# EAGLE board Pin-with-a-screen-3v3 (EAGLE 7.6.0)
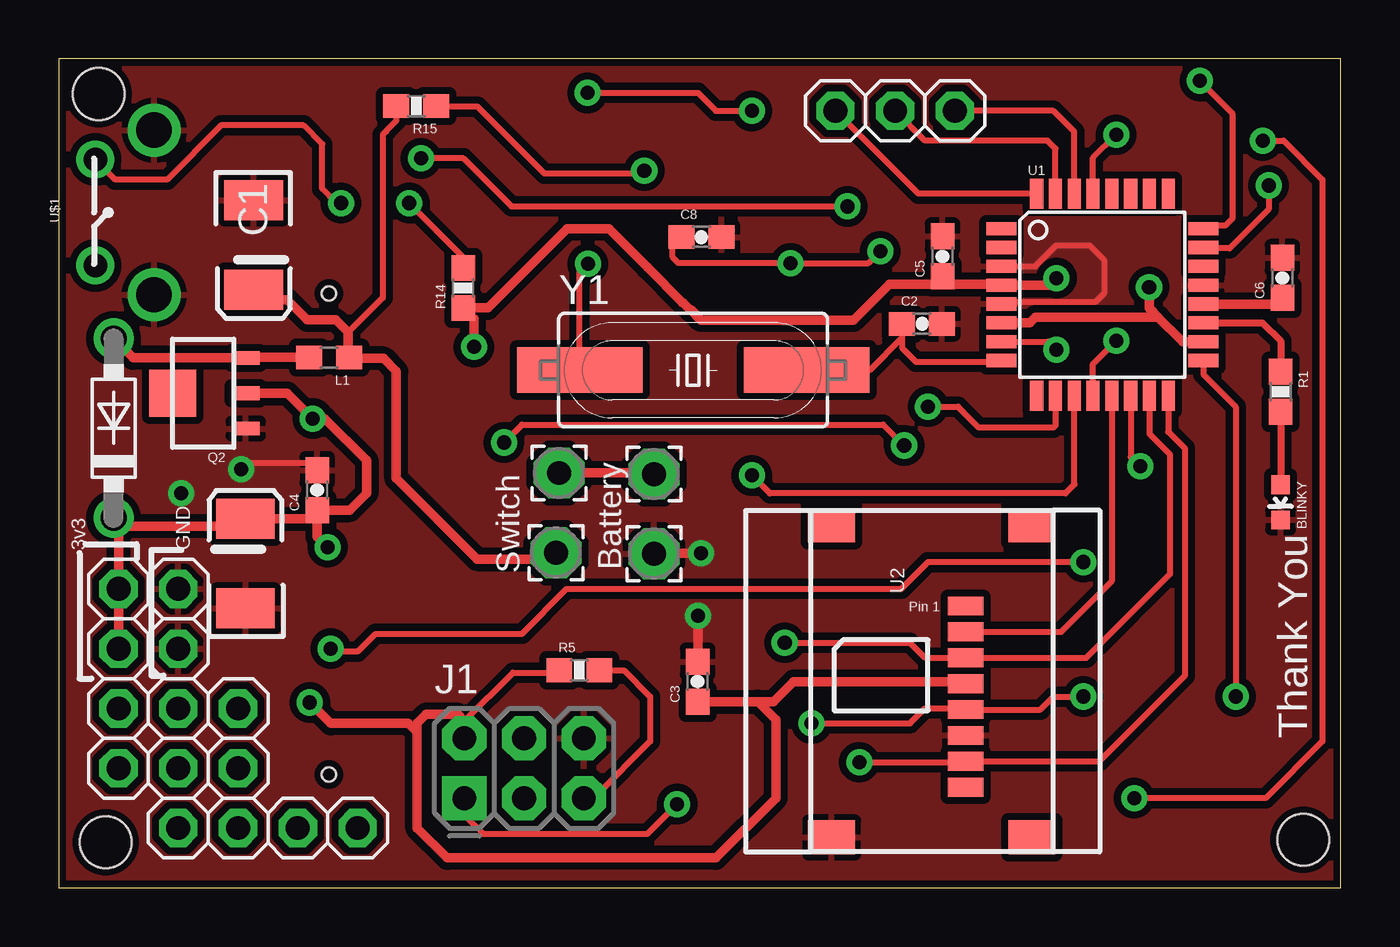
[diagram p0: board, top side]
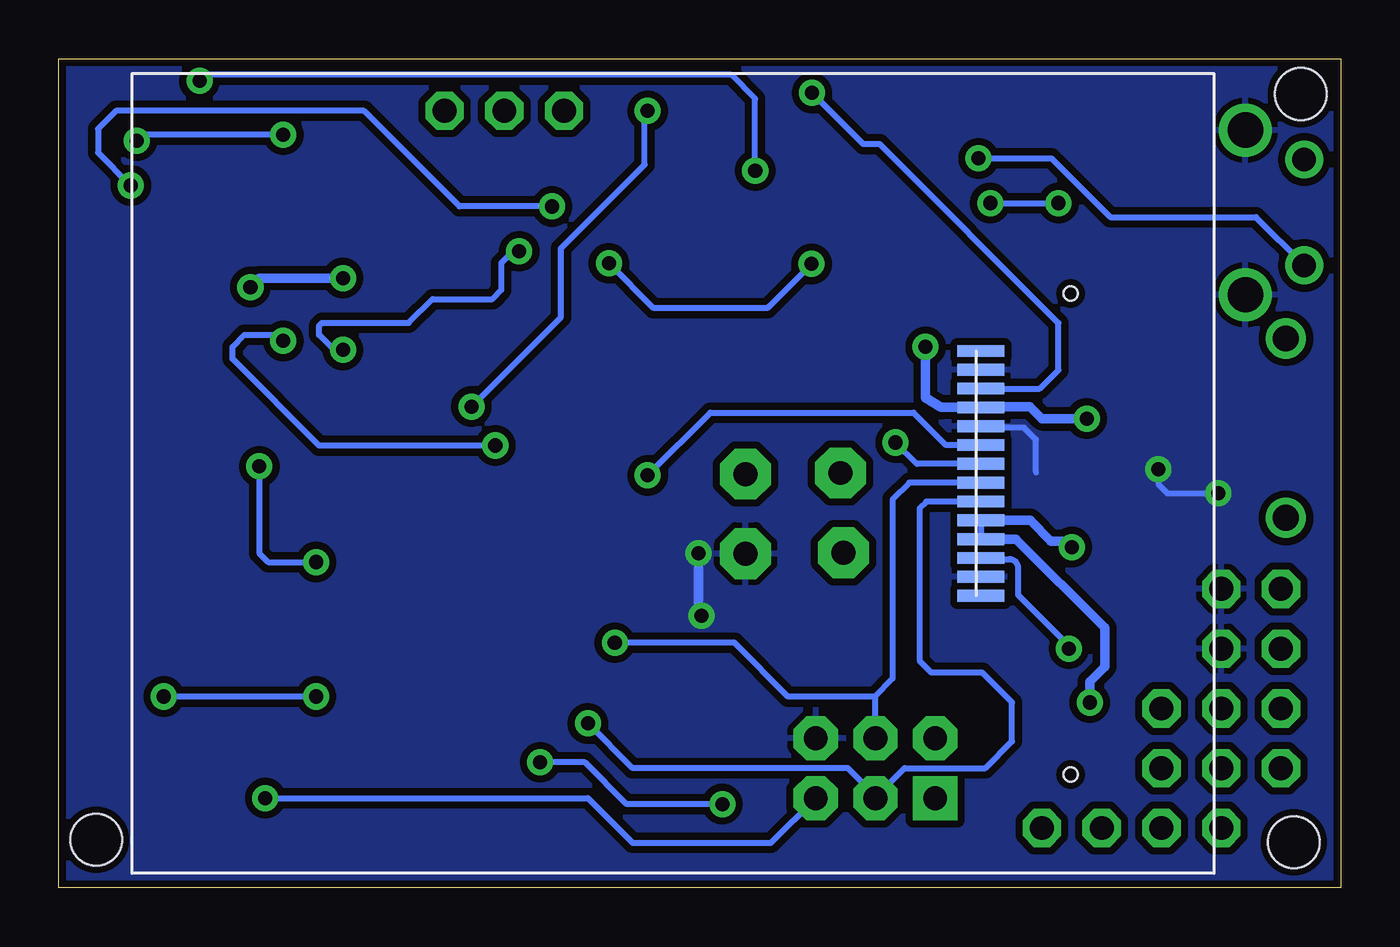
[diagram p1: board, bottom side, seen from below]

Size 54.5 x 35.23 mm. Coordinates in mm from the lower left corner, seen from the top.
Outline: 0,0 54.5,0 54.5,35.23 0,35.23 0,0
Copper layers (1*16): Top 0.035mm / dielectric 1.5mm / Bottom 0.035mm
Design rules "SparkFun": minimum track width 8mil, minimum drill 20mil, track to track 8mil, track to pad 8mil, pad to pad 8mil, via to via 8mil, smd to smd 8mil, copper to edge 8mil, drill to drill 8mil, minimum pad ring 12mil, minimum via ring 10mil, stop-mask expansion 4mil, vias tented up to drill 20mil, thermal gap 10mil
Holes 2.2 mm at 1.69,33.74 52.91,2.05 1.99,1.94

## Footprints (pad centres in the part's own frame; a part is rotated, then mirrored left to right if it is on the bottom)
LED-0603 = smd 0.8 x 0.8: A 0,-0.75; C 0,0.75
EIA3528-KIT = smd 1.7 x 2.5: A 1.9,0; C -1.9,0
0603-CAP = smd 1.1 x 1: 1 -0.85,0; 2 0.85,0
DO41-7.6 = drill 1.1 pad 1.7: A 3.81,0; C -3.81,0
2X3-NS = drill 1.016 pad 1.88 square: 1 -2.54,-1.27 | drill 1.016 pad 1.88 octagon: 2 -2.54,1.27; 3 0,-1.27; 4 0,1.27; 5 2.54,-1.27; 6 2.54,1.27
1X01 = drill 1.016 octagon: 1 0,0
0603 = smd 1.1 x 1: 1 -0.85,0; 2 0.85,0
JD-T1800 = smd 0.5 x 2: 1 5.2,-13.1; 2 4.4,-13.1; 3 3.6,-13.1; 4 2.8,-13.1; 5 2,-13.1; 6 1.2,-13.1; 7 0.4,-13.1; 8 -0.4,-13.1; 9 -1.2,-13.1; 10 -2,-13.1; 11 -2.8,-13.1; 12 -3.6,-13.1; 13 -4.4,-13.1; 14 -5.2,-13.1 | hole 0.6: -12.8,-16.9; 7.65,-16.9
2,15/1,0 = drill 1.016 pad 2.159 octagon: 1 0,0
SOT89 = smd 0.58 x 1.2: 1 -1.5,-1.8; 2 0,-1.8; 3 1.5,-1.8 | smd 2 x 2: 4 0,1.3
0603-RES = smd 1.1 x 1: 1 -0.85,0; 2 0.85,0
TQFP32-08 = smd 1.27 x 0.559: 1 -4.293,2.8; 2 -4.293,2; 3 -4.293,1.2; 4 -4.293,0.4; 5 -4.293,-0.4; 6 -4.293,-1.2; 7 -4.293,-2; 8 -4.293,-2.8; 17 4.293,-2.8; 18 4.293,-2; 19 4.293,-1.2; 20 4.293,-0.4; 21 4.293,0.4; 22 4.293,1.2; 23 4.293,2; 24 4.293,2.8 | smd 0.559 x 1.27: 9 -2.8,-4.293; 10 -2,-4.293; 11 -1.2,-4.293; 12 -0.4,-4.293; 13 0.4,-4.293; 14 1.2,-4.293; 15 2,-4.293; 16 2.8,-4.293; 25 2.8,4.293; 26 2,4.293; 27 1.2,4.293; 28 0.4,4.293; 29 -0.4,4.293; 30 -1.2,4.293; 31 -2,4.293; 32 -2.8,4.293
MICRO-SD-SOCKET-SMD-1:1 = smd 0.8 x 1.5: 1 10.45,6.4; 2 9.35,6.4; 3 8.25,6.4; 4 7.15,6.4; 5 6.05,6.4; 6 4.95,6.4; 7 3.85,6.4; 8 2.75,6.4 | smd 1.45 x 2: 9 0.62,12.1; 10 13.88,12.1; 11 0.62,3.59; 12 13.88,3.59
5MM-PTH = drill 1: 1 -2.25,-1.25; 2 2.25,-1.25 | drill 1.5: GND -3.5,1.25; GND1 3.5,1.25
HC49UP = smd 5.334 x 1.93: 1 -4.826,0; 2 4.826,0

## Placement (x,y rotation side)
BLINKY  Red  [LED-0603]  51.94,16.38 180 top
C1  47uF  [EIA3528-KIT]  8.29,27.31 270 top
C2  22pF  [0603-CAP]  36.7,23.97 0 top
C3  0.1uF  [0603-CAP]  27.16,8.76 90 top
C4  0.1uF  [0603-CAP]  10.98,16.9 90 top
C5  0.1uF  [0603-CAP]  37.58,26.84 90 top
C6  0.1uF  [0603-CAP]  52.02,25.93 90 top
C7  100uF  [EIA3528-KIT]  7.94,13.78 90 top
C8  22pF  [0603-CAP]  27.32,27.65 0 top
D1  1N5819-B  [DO41-7.6]  2.33,19.53 90 top
J1  AVR_SPI_PRG_6NS  [2X3-NS]  19.78,5.08 0 top
JP1  [1X01]  38.1,33.02 0 top
JP2  [1X01]  35.56,33.02 0 top
JP3  [1X01]  33.02,33.02 0 top
JP5  [1X01]  2.54,12.7 0 top
JP6  [1X01]  5.08,12.7 0 top
JP7  [1X01]  2.54,10.16 0 top
JP8  [1X01]  5.08,10.16 0 top
JP9  [1X01]  2.54,7.62 0 top
JP10  [1X01]  5.08,7.62 0 top
JP11  [1X01]  7.62,7.62 0 top
JP12  [1X01]  2.54,5.08 0 top
JP13  [1X01]  5.08,5.08 0 top
JP14  [1X01]  7.62,5.08 0 top
JP16  [1X01]  5.08,2.54 0 top
JP17  [1X01]  7.62,2.54 0 top
JP18  [1X01]  10.16,2.54 0 top
JP19  [1X01]  12.7,2.54 0 top
L1  22uH  [0603]  11.49,22.54 180 top
LCD2  JD-T1800  [JD-T1800]  28.39,17.62 90 bottom
PAD1  [2,15/1,0]  25.3,17.58 0 top
PAD2  [2,15/1,0]  25.3,14.2 0 top
PAD3  [2,15/1,0]  21.27,17.63 0 top
PAD4  [2,15/1,0]  21.14,14.24 0 top
Q2  BL8530  [SOT89]  6.14,21.02 90 top
R1  51R  [0603-RES]  51.94,21.08 270 top
R5  1k  [0603-RES]  22.13,9.24 0 top
R14  1k  [0603-RES]  17.2,25.49 90 top
R15  1k  [0603-RES]  15.2,33.23 180 top
U1  ATMEGA328P  [TQFP32-08]  44.37,25.21 0 top
U2  MICRO-SD-SOCKET-SMD1:1  [MICRO-SD-SOCKET-SMD-1:1]  44.96,1.52 90 top
U$1  SWITCH-TACT-5MM-PTH-HORIZ  [5MM-PTH]  2.8,28.7 270 top
Y1  8MHz  [HC49UP]  26.97,22 0 top

## Library data of the parts
BLINKY C2-C6 C8 L1 Q2 = SparkFun
C1 C7 = SparkFun-Capacitors
D1 = diode
J1 = SparkFun-Connectors
JP1-JP3 JP5-JP14 JP16-JP19 = pinhead
LCD2 = adafruit
PAD1-PAD4 = wirepad
R1 R5 R14 R15 = SparkFun-Passives
U1 = SparkFun-DigitalIC; PROD_ID: IC-09069
U2 = SD-library-Adnan
U$1 = switches_adnan
Y1 = SparkFun-FreqCtrl

## Nets
3.3V: C3.1 C4.1 C5.1 C7.A D1.C J1.2 JP5.1 JP7.1 LCD2.4 LCD2.10 LCD2.11 Q2.2 R5.1 R14.1 U1.4 U1.6 U1.18 U2.4
BATT_OUT: C1.A L1.1 PAD4.1 R15.2
BATT_VOLT: R15.1 U1.24
CARDCS: U1.13 U2.2
GND: BLINKY.C C1.C C2.2 C3.2 C4.2 C5.2 C6.2 C7.C C8.2 J1.6 JP6.1 JP8.1 LCD2.2 LCD2.5 LCD2.13 PAD2.1 Q2.1 U1.3 U1.5 U1.21 U2.6 U2.9 U$1.GND U$1.GND1
LX: D1.A L1.2 Q2.3
MISO: J1.1 U1.16 U2.7
MOSI: J1.4 LCD2.8 U1.15 U2.3
N$1: U1.23 U$1.2
N$2: R14.2 U$1.1
N$3: C6.1 U1.20
N$4: C8.1 U1.7 Y1.1
N$5: C2.1 U1.8 Y1.2
N$6: J1.5 R5.2 U1.29
N$7: R1.1 U1.19
N$8: BLINKY.A R1.2
PD0: JP1.1 U1.30
PD1: JP2.1 U1.31
PD2: JP3.1 U1.32
SCK: J1.3 LCD2.9 U1.17 U2.5
TFT_BACKLIGHT: LCD2.3 U1.10
TFTCS: LCD2.12 U1.14
TFTDC: LCD2.7 U1.12
TFTRESET: LCD2.6 U1.11
VCC_BATT_IN: PAD1.1 PAD3.1

## Tracks (layer width: path | path; a pad name or v marks a point on that pad's centre or on a via)
3.3V  (via drill 0.6)
  Top 0.254: 17.24,7.08 19.3,9.14 21.18,9.14 R5.1 | 37.24,25.65 C5.1 | 40.03,25.65 U1.4 | U1.6 | 10.73,20 v10.79,19.94 | 17.65,24.18 R14.1
  Top 0.406: C3.1 29.72,7.91 | 29.72,7.91 30.39,7.91 31.24,8.76 38.47,8.76 U2.4 | 29.72,7.91 30.48,7.15 30.48,3.81 27.94,1.27 16.51,1.27 15.24,2.54 15.24,6.6 | J1.2 17.24,7.08 16.95,7.37 15.62,7.37 15.24,6.99 15.24,6.6 | 40.03,25.65 37.58,25.65 C5.1 | U1.6 41.27,24 41.53,24.26 46.74,24.26 | U1.18 47.78,23.21 46.74,24.26 | 37.24,25.65 35.31,25.65 33.78,24.13 27.3,24.13 26.88,24.56 26.84,24.56 26.53,24.87 26.52,24.87 25.02,26.37 25.02,26.38 23.4,28 21.6,28 18.24,24.64 R14.1 | U1.4 42.12,25.61 v42.42,25.91 | v46.35,25.53 46.35,24.64 46.74,24.26 | v17.65,22.99 17.65,24.18 | C4.1 10.61,15.68 C7.A 7.63,15.37 2.69,15.37 D1.C 2.54,15.51 JP5.1 JP7.1 | Q2.2 9.72,21.02 v10.79,19.94 11.3,19.94 13.08,18.16 13.08,16.76 12.37,16.05 C4.1 | C4.1 10.98,14.92 v11.43,14.48 | 15.24,6.6 14.86,6.99 11.56,6.99 v10.67,7.87
  Bottom 0.254: LCD2.10 LCD2.11 | LCD2.4 15.26,20.45
  Bottom 0.406: LCD2.10 13.2,15.62 12.32,14.73 11.68,14.73 v11.43,14.48 | 15.26,20.45 13.21,20.45 12.7,19.94 v10.79,19.94 | LCD2.4 16.99,20.42 17.65,20.83 v17.65,22.99 | v42.42,25.91 45.97,25.91 v46.35,25.53 | LCD2.11 13.8,14.82 10.03,11.05 10.03,9.4 10.67,8.76 v10.67,7.87
BATT_OUT
  Top 0.254: R15.2 14.35,32.61 13.92,32.18 13.92,32.15 13.77,32 13.77,25.07 12.3,23.6
  Top 0.406: PAD4.1 20.86,13.97 17.78,13.97 14.35,17.4 14.35,21.95 13.8,22.5 12.38,22.5 L1.1 12.3,22.58 12.3,23.6 11.76,24.14 10.56,24.14 9.7,25 8.7,25 C1.A
BATT_VOLT  (via drill 0.6)
  Top 0.254: v24.89,30.48 24.77,30.35 20.65,30.35 17.8,33.2 16.08,33.2 R15.1 | U1.24 48.51,28.16 49.62,28.16 49.91,28.45 49.91,32.89 v48.51,34.29
  Bottom 0.254: v24.89,30.48 24.89,33.53 25.91,34.54 48.26,34.54 v48.51,34.29
CARDCS
  Top 0.254: U1.13 44.77,13.02 42.62,10.87 U2.2
GND  (via drill 0.6)
  Top 0.254: U1.5 40.16,24.89 44.07,24.89 44.45,25.27 44.45,26.67 43.81,27.3 42.42,27.3 41.52,26.41 U1.3 | C4.2 10.7,18.03 8,18.03 v7.75,17.78 | 27.18,9.63 C3.2
  Top 0.406: v27.18,11.56 27.18,9.63 | v27.3,14.22 25.32,14.22 PAD2.1
  Bottom 0.254: 27.3,11.3 27.18,11.18 v27.18,11.56 | 12.95,17.65 12.95,19.05 13.46,19.56 15.23,19.56 LCD2.5 | v7.75,17.78 7.75,17.14 7.37,16.76 v5.21,16.76
  Bottom 0.406: v27.3,14.22 27.3,11.3
  pour Top (isolate 0.305): -5.08,37.85 -5.08,-3.81 59.18,-3.81 59.18,37.85
  pour Bottom (isolate 0.305): -2.54,36.45 -2.54,-1.27 56.64,-1.27 56.64,36.45
LX
  Top 0.406: D1.A 3.16,22.52 Q2.3 7.96,22.54 L1.2
MISO  (via drill 0.6)
  Top 0.254: J1.1 17.24,3.08 18.03,2.29 25.02,2.29 v26.29,3.56 | U1.16 47.17,19.38 47.88,18.67 47.88,9.02 44.24,5.37 U2.7 38.52,5.33 v34.04,5.33
  Bottom 0.254: v26.29,3.56 30.35,3.56 32.13,5.33 v34.04,5.33
MOSI  (via drill 0.6)
  Top 0.254: U1.15 46.37,19.29 47.24,18.41 47.24,13.34 43.68,9.77 U2.3 36.83,9.78 36.2,10.41 v30.86,10.41
  Bottom 0.254: LCD2.8 18.34,17.22 19.05,16.51 19.05,8.89 19.81,8.13 | 19.81,8.13 19.81,6.38 J1.4 | 19.81,8.13 23.5,8.13 25.78,10.41 v30.86,10.41
N$1  (via drill 0.6)
  Top 0.254: v33.53,28.96 19.24,28.96 17.2,31 v15.4,31 | v51.44,29.84 51.44,28.83 49.78,27.18 48.7,27.18 U1.23
  Bottom 0.254: v33.53,28.96 37.47,28.96 41.53,33.02 52.07,33.02 52.83,32.26 52.83,31.24 v51.44,29.84 | U$1.2 3.6,28.5 9.8,28.5 12.3,31 v15.4,31
N$2  (via drill 0.6)
  Top 0.254: R14.2 17.2,26.8 v14.9,29.1 | v12,29.1 11.8,29.1 11.2,29.7 11.2,31.6 10.4,32.4 6.9,32.4 4.6,30.1 2.4,30.1 U$1.1
  Bottom 0.254: v14.9,29.1 v12,29.1
N$3
  Top 0.254: 51.76,24.81 C6.1
  Top 0.406: U1.20 51.76,24.81
N$4  (via drill 0.6)
  Top 0.254: U1.7 42.07,23.21 v42.42,22.86 | Y1.1 22.14,26.16 v22.5,26.52 | v34.92,27.05 34.42,26.54 v31.11,26.54 26.36,26.54 26.1,26.8 26.1,27.28 C8.1
  Bottom 0.254: v42.42,22.86 42.8,22.86 43.43,23.5 43.43,23.88 43.31,24 39.62,24 38.61,25.02 36.07,25.02 35.69,25.4 35.69,26.54 35.18,27.05 v34.92,27.05 | v31.11,26.54 29.21,24.64 25.27,24.64 25.27,24.63 24.38,24.63 24.31,24.7 24.3,24.7 22.5,26.5 v22.5,26.52
N$5
  Top 0.254: C2.1 35.85,23.37 | 35.85,23.37 35.85,22.95 36.45,22.35 40.02,22.35 U1.8 | Y1.2 34.48,22 35.85,23.37
N$6  (via drill 0.6)
  Top 0.254: U1.29 43.97,31.02 v44.96,32 | v51.18,31.75 52.07,31.75 53.72,30.1 53.72,6.22 51.31,3.81 v45.72,3.81 | J1.5 22.45,3.94 22.86,3.94 25.15,6.22 25.15,8.13 24.03,9.24 R5.2
  Bottom 0.254: v44.96,32 50.93,32 v51.18,31.75 | v45.72,3.81 32,3.81 30.1,1.91 24.23,1.91 J1.5
N$7
  Top 0.305: U1.19 51.17,24.01 51.94,23.24 R1.1
N$8
  Top 0.305: R1.2 BLINKY.A
PD0
  Top 0.254: U1.30 43.17,32.14 42.29,33.02 JP1.1
PD1
  Top 0.254: U1.31 42.37,31.42 42.04,31.75 36.83,31.75 JP2.1
PD2
  Top 0.254: U1.32 36.54,29.5 JP3.1
SCK  (via drill 0.6)
  Top 0.254: U1.17 48.66,21.82 50.04,20.45 v50.04,8.13 | v43.56,8.13 42.29,8.13 41.74,7.57 U2.5 38.51,7.62 36.83,7.62 36.2,6.99 v32,6.99
  Bottom 0.254: LCD2.9 17.62,16.42 17.91,16.13 17.91,9.65 17.4,9.14 15.24,9.14 13.97,7.87 13.97,6.22 15.11,5.08 18.54,5.08 19.71,3.91 19.71,3.81 J1.3 19.78,3.9 20.95,5.08 30.1,5.08 v32,6.99 | v43.56,8.13 v50.04,8.13
TFT_BACKLIGHT  (via drill 0.6)
  Top 0.254: U1.10 42.37,19.64 42.29,19.56 39.12,19.56 38.23,20.45 v36.96,20.45 | v22.48,33.78 27.18,33.78 27.94,33.02 v29.46,33.02
  Bottom 0.254: v29.46,33.02 29.59,32.89 29.59,30.73 33.15,27.18 33.15,24.26 v36.96,20.45 | LCD2.3 15.28,21.21 12.79,21.21 12,22 12,24 19.6,31.6 20.3,31.6 v22.48,33.78
TFTCS  (via drill 0.6)
  Top 0.254: 45.59,20.89 U1.14 45.57,18.31 v45.97,17.91 | v43.56,13.84 36.96,13.84 35.81,12.7 21.59,12.7 19.68,10.79 13.46,10.79 12.7,10.03 11.68,10.03 v11.56,10.16
  Bottom 0.254: LCD2.12 15.24,13.97 14.1,13.97 arc90 13.72,13.59 13.72,12.45 11.56,10.29 v11.56,10.16 | v45.97,17.91 45.97,14.22 45.59,13.84 v43.56,13.84
TFTDC  (via drill 0.6)
  Top 0.254: v35.94,18.8 35.05,19.68 19.68,19.68 v18.92,18.92 | v44.96,23.24 43.94,22.23 43.94,20.95 U1.12
  Bottom 0.254: v44.96,23.24 45.21,23.5 46.61,23.5 47.12,22.99 47.12,22.48 43.43,18.8 v35.94,18.8 | LCD2.7 18.02,18.02 v18.92,18.92
TFTRESET  (via drill 0.6)
  Top 0.254: U1.11 43.18,20.91 43.18,17.14 42.8,16.76 30.23,16.76 v29.46,17.53
  Bottom 0.254: LCD2.6 16.78,18.82 18.16,20.19 26.8,20.19 v29.46,17.53
VCC_BATT_IN
  Top 0.406: PAD3.1 25.25,17.63 PAD1.1

## Text on the board
tNames: 3v3 | GND | Battery | Switch | Thank You